# EAGLE board chipcarrier_mehrfach_mill (EAGLE 7.7.0)
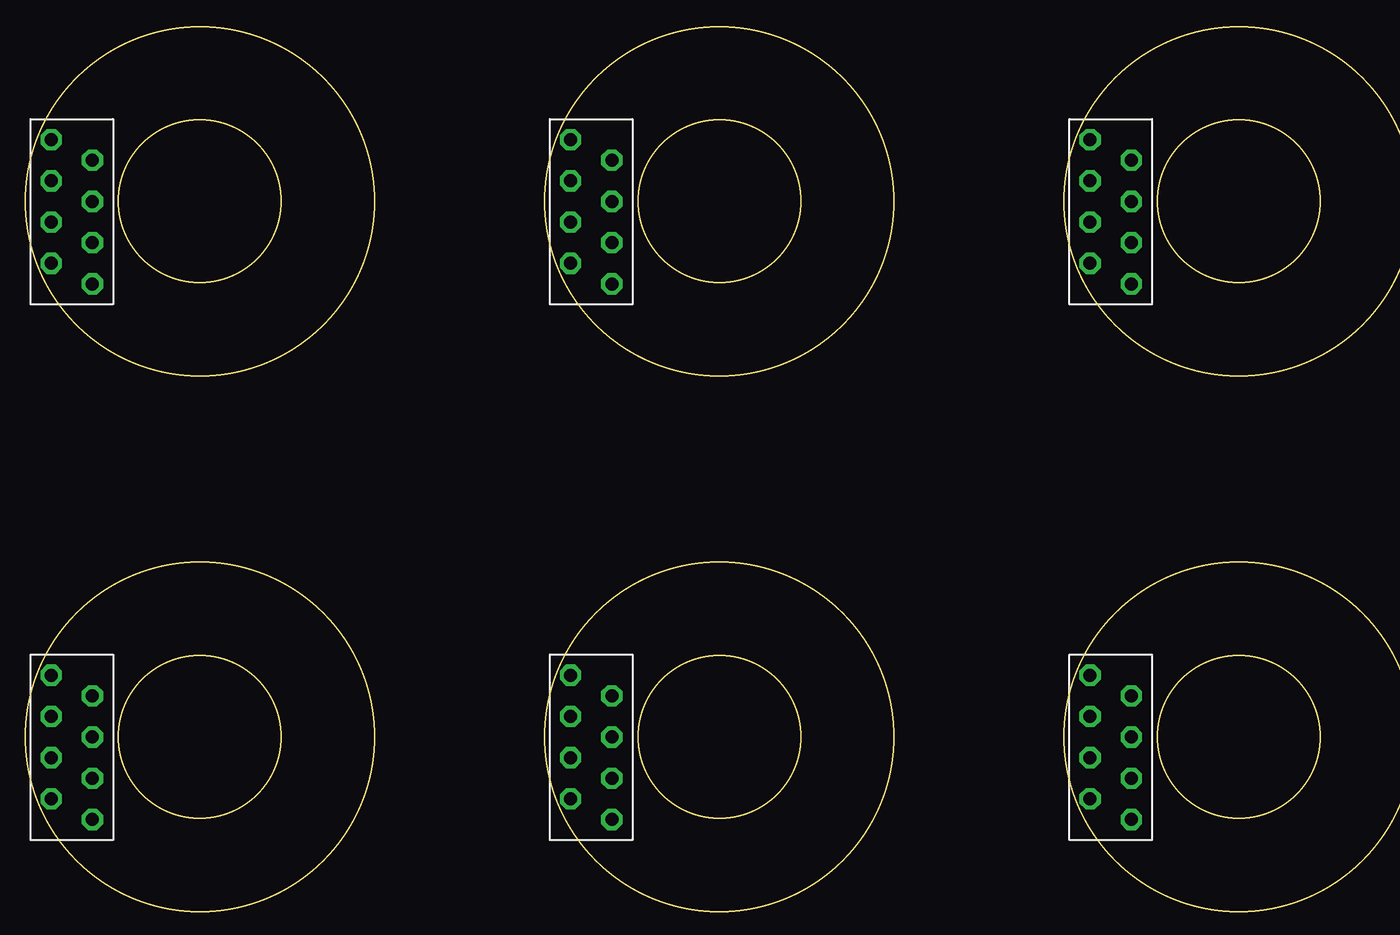
[diagram p0: board, top side]
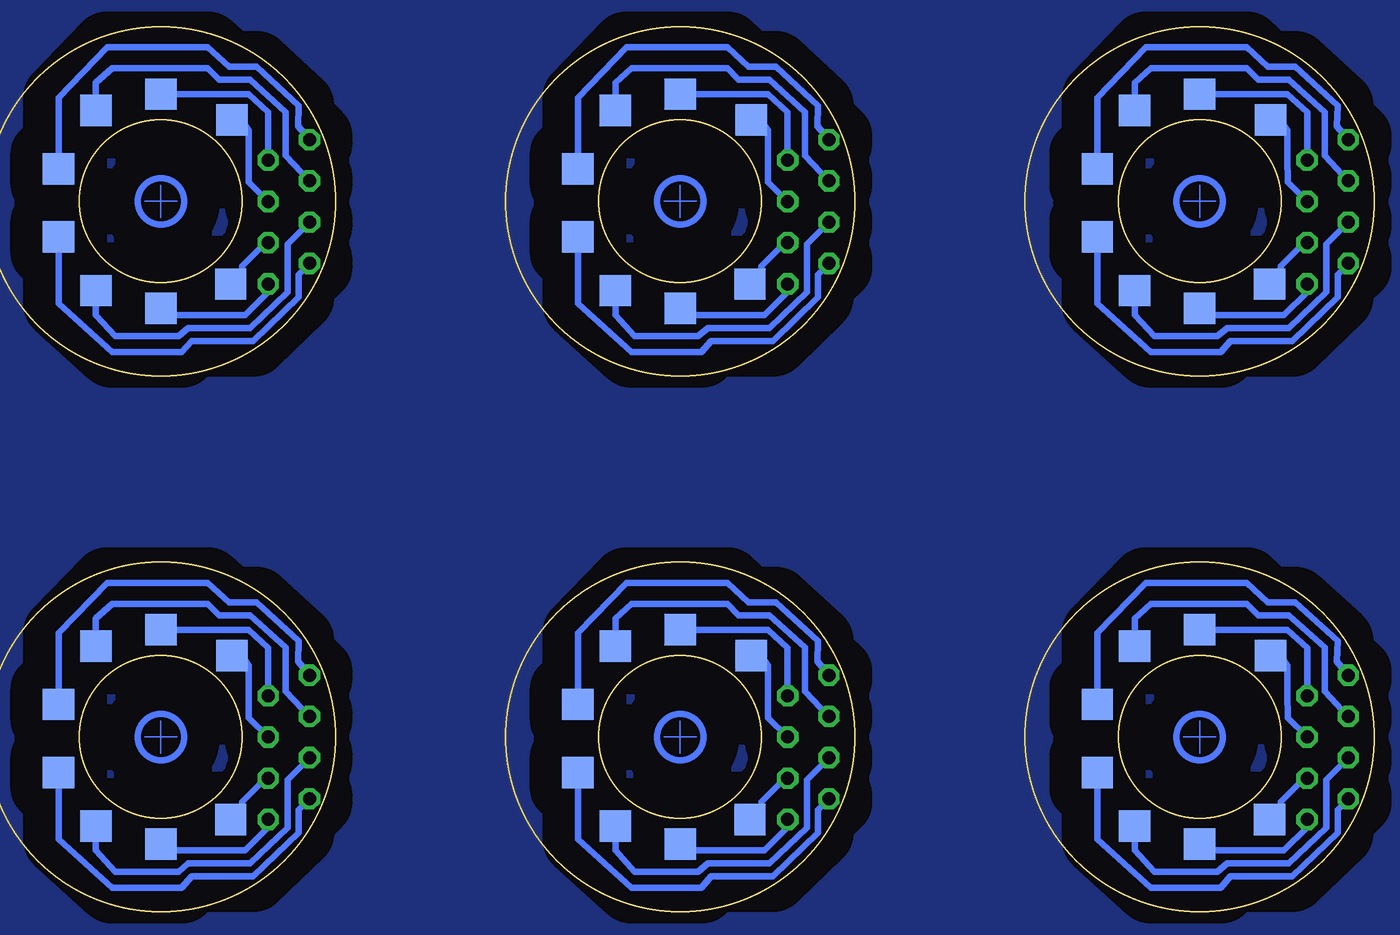
[diagram p1: board, bottom side, seen from below]

No outline drawn. Coordinates in mm, seen from the top.
Copper layers (1*16): Top 0.035mm / dielectric 1.5mm / Bottom 0.035mm
Design rules "default *": minimum track width 10mil, minimum drill 24mil, track to track 2mm, track to pad 3mm, pad to pad 2mm, via to via 2mm, smd to smd 8mil, copper to edge 1mm, drill to drill 8mil, minimum pad ring 10mil, minimum via ring 8mil, stop-mask expansion 4mil, vias tented up to drill 0mil, thermal gap 10mil
Milling: area 13,16 to 23,26; area 7.2,10.2 to 28.8,31.8; area 45,16 to 55,26; area 39.2,10.2 to 60.8,31.8; area 77,16 to 87,26; area 71.2,10.2 to 92.8,31.8; area 13,49 to 23,59; area 7.2,43.2 to 28.8,64.8; area 45,49 to 55,59; area 39.2,43.2 to 60.8,64.8; area 77,49 to 87,59; area 71.2,43.2 to 92.8,64.8; 8 lines

## Footprints (pad centres in the part's own frame; a part is rotated, then mirrored left to right if it is on the bottom)
BUCHSE_8PIN = drill 0.8 octagon: P$1 1.27,0; P$2 -1.27,1.27; P$3 1.27,-2.54; P$4 -1.27,-1.27; P$5 1.27,-5.08; P$6 -1.27,-3.81; P$7 1.27,-7.62; P$8 -1.27,-6.35
PAD = smd 1.93 x 1.93 bottom: P$1 0,0

## Placement (x,y rotation side)
U$1  BUCHSE_8PIN  [BUCHSE_8PIN]  10.11,23.53 0 top
U$2  PAD  [PAD]  18,27.6 90 top
U$3  PAD  [PAD]  24.3,23 90 top
U$4  PAD  [PAD]  13.62,26.01 90 top
U$5  PAD  [PAD]  22,26.6 90 top
U$6  PAD  [PAD]  13.7,15.9 90 top
U$7  PAD  [PAD]  22,15.5 90 top
U$8  PAD  [PAD]  18,14.4 90 top
U$9  PAD  [PAD]  24.3,18.8 180 top
U$10  BUCHSE_8PIN  [BUCHSE_8PIN]  42.11,23.53 0 top
U$11  PAD  [PAD]  50,27.6 90 top
U$12  PAD  [PAD]  56.3,23 90 top
U$13  PAD  [PAD]  45.62,26.01 90 top
U$14  PAD  [PAD]  54,26.6 90 top
U$15  PAD  [PAD]  54,15.5 90 top
U$16  PAD  [PAD]  45.7,15.9 90 top
U$17  PAD  [PAD]  50,14.4 90 top
U$18  PAD  [PAD]  56.3,18.8 180 top
U$19  BUCHSE_8PIN  [BUCHSE_8PIN]  74.11,23.53 0 top
U$20  PAD  [PAD]  82,27.6 90 top
U$21  PAD  [PAD]  88.3,23 90 top
U$22  PAD  [PAD]  77.62,26.01 90 top
U$23  PAD  [PAD]  86,26.6 90 top
U$24  PAD  [PAD]  86,15.5 90 top
U$25  PAD  [PAD]  77.7,15.9 90 top
U$26  PAD  [PAD]  82,14.4 90 top
U$27  PAD  [PAD]  88.3,18.8 180 top
U$28  BUCHSE_8PIN  [BUCHSE_8PIN]  10.11,56.53 0 top
U$29  PAD  [PAD]  18,60.6 90 top
U$30  PAD  [PAD]  24.3,56 90 top
U$31  PAD  [PAD]  13.62,59.01 90 top
U$32  PAD  [PAD]  22,59.6 90 top
U$33  PAD  [PAD]  22,48.5 90 top
U$34  PAD  [PAD]  13.7,48.9 90 top
U$35  PAD  [PAD]  18,47.4 90 top
U$36  PAD  [PAD]  24.3,51.8 180 top
U$37  BUCHSE_8PIN  [BUCHSE_8PIN]  42.11,56.53 0 top
U$38  PAD  [PAD]  50,60.6 90 top
U$39  PAD  [PAD]  56.3,56 90 top
U$40  PAD  [PAD]  45.62,59.01 90 top
U$41  PAD  [PAD]  54,59.6 90 top
U$42  PAD  [PAD]  54,48.5 90 top
U$43  PAD  [PAD]  45.7,48.9 90 top
U$44  PAD  [PAD]  50,47.4 90 top
U$45  PAD  [PAD]  56.3,51.8 180 top
U$46  BUCHSE_8PIN  [BUCHSE_8PIN]  74.11,56.53 0 top
U$47  PAD  [PAD]  82,60.6 90 top
U$48  PAD  [PAD]  88.3,56 90 top
U$49  PAD  [PAD]  77.62,59.01 90 top
U$50  PAD  [PAD]  86,59.6 90 top
U$51  PAD  [PAD]  86,48.5 90 top
U$52  PAD  [PAD]  77.7,48.9 90 top
U$53  PAD  [PAD]  82,47.4 90 top
U$54  PAD  [PAD]  88.3,51.8 180 top

## Library data of the parts
U$1-U$54 = chipcarrier

## Nets
N$1: U$1.P$1 U$2.P$1
N$2: U$1.P$2 U$3.P$1
N$3: U$1.P$3 U$4.P$1
N$4: U$1.P$4 U$5.P$1
N$5: U$1.P$5 U$6.P$1
N$6: U$1.P$6 U$7.P$1
N$7: U$1.P$7 U$8.P$1
N$8: U$1.P$8 U$9.P$1
N$9: U$10.P$1 U$11.P$1
N$12: U$10.P$2 U$12.P$1
N$13: U$10.P$3 U$13.P$1
N$14: U$10.P$4 U$14.P$1
N$15: U$10.P$5 U$16.P$1
N$16: U$10.P$6 U$15.P$1
N$17: U$10.P$7 U$17.P$1
N$18: U$10.P$8 U$18.P$1
N$21: U$19.P$1 U$20.P$1
N$22: U$19.P$2 U$21.P$1
N$23: U$19.P$3 U$22.P$1
N$24: U$19.P$4 U$23.P$1
N$25: U$19.P$5 U$25.P$1
N$26: U$19.P$6 U$24.P$1
N$27: U$19.P$7 U$26.P$1
N$28: U$19.P$8 U$27.P$1
N$31: U$28.P$1 U$29.P$1
N$32: U$28.P$2 U$30.P$1
N$33: U$28.P$3 U$31.P$1
N$34: U$28.P$4 U$32.P$1
N$35: U$28.P$5 U$34.P$1
N$36: U$28.P$6 U$33.P$1
N$37: U$28.P$7 U$35.P$1
N$38: U$28.P$8 U$36.P$1
N$41: U$37.P$1 U$38.P$1
N$42: U$37.P$2 U$39.P$1
N$43: U$37.P$3 U$40.P$1
N$44: U$37.P$4 U$41.P$1
N$45: U$37.P$5 U$43.P$1
N$46: U$37.P$6 U$42.P$1
N$47: U$37.P$7 U$44.P$1
N$48: U$37.P$8 U$45.P$1
N$51: U$46.P$1 U$47.P$1
N$52: U$46.P$2 U$48.P$1
N$53: U$46.P$3 U$49.P$1
N$54: U$46.P$4 U$50.P$1
N$55: U$46.P$5 U$52.P$1
N$56: U$46.P$6 U$51.P$1
N$57: U$46.P$7 U$53.P$1
N$58: U$46.P$8 U$54.P$1

## Tracks (layer width: path | path; a pad name or v marks a point on that pad's centre or on a via)
N$1
  Bottom 0.406: U$1.P$1 11.38,26.48 12.6,27.6 U$2.P$1
N$2
  Bottom 0.406: U$1.P$2 9.54,25.64 9.5,26.9 12.1,29.3 13.8,29.3 15.1,30.5 21.3,30.5 24.3,27.4 U$3.P$1 25,22.5
N$3
  Bottom 0.406: U$1.P$3 12.58,22.18 12.6,23.7 12.6,25.4 13,26 13.31,26 U$4.P$1
N$4
  Bottom 0.406: U$1.P$4 8.84,22.24 10.3,23.8 10.3,26.5 12.5,28.5 14.4,28.5 15.1,29.2 21,29.2 22,28.3 U$5.P$1
N$5
  Bottom 0.406: U$1.P$5 11.55,18.45 13,17 13,16.2 U$6.P$1
N$6
  Bottom 0.406: U$1.P$6 10.2,18.36 10.2,15.4 12.5,13.2 16.3,13.2 16.9,12.7 20.8,12.7 22,14 U$7.P$1
N$7
  Bottom 0.406: U$1.P$7 11.38,15.42 12.8,14 17.9,14 U$8.P$1
N$8
  Bottom 0.406: 25,19.5 U$9.P$1 24.3,14.7 21,11.7 16.7,11.7 16.1,12.4 12.3,12.4 9.5,15.1 9.5,16.5 8.84,17.16 U$1.P$8
N$9
  Bottom 0.406: U$10.P$1 43.38,26.48 44.6,27.6 U$11.P$1
N$10
  Bottom 0.1: 18,22 18,20
N$11
  Bottom 0.1: 17,21 19,21
N$12
  Bottom 0.406: U$10.P$2 41.54,25.64 41.5,26.9 44.1,29.3 45.8,29.3 47.1,30.5 53.3,30.5 56.3,27.4 U$12.P$1 57,22.5
N$13
  Bottom 0.406: U$10.P$3 44.58,22.18 44.6,23.7 44.6,25.4 45,26 45.31,26 U$13.P$1
N$14
  Bottom 0.406: U$10.P$4 40.84,22.24 42.3,23.8 42.3,26.5 44.5,28.5 46.4,28.5 47.1,29.2 53,29.2 54,28.3 U$14.P$1
N$15
  Bottom 0.406: U$10.P$5 43.55,18.45 45,17 45,16.2 U$16.P$1
N$16
  Bottom 0.406: U$10.P$6 42.2,18.36 42.2,15.4 44.5,13.2 48.3,13.2 48.9,12.7 52.8,12.7 54,14 U$15.P$1
N$17
  Bottom 0.406: U$10.P$7 43.38,15.42 44.8,14 49.9,14 U$17.P$1
N$18
  Bottom 0.406: 57,19.5 U$18.P$1 56.3,14.7 53,11.7 48.7,11.7 48.1,12.4 44.3,12.4 41.5,15.1 41.5,16.5 40.84,17.16 U$10.P$8
N$19
  Bottom 0.1: 50,22 50,20
N$20
  Bottom 0.1: 49,21 51,21
N$21
  Bottom 0.406: U$19.P$1 75.38,26.48 76.6,27.6 U$20.P$1
N$22
  Bottom 0.406: U$19.P$2 73.54,25.64 73.5,26.9 76.1,29.3 77.8,29.3 79.1,30.5 85.3,30.5 88.3,27.4 U$21.P$1 89,22.5
N$23
  Bottom 0.406: U$19.P$3 76.58,22.18 76.6,23.7 76.6,25.4 77,26 77.31,26 U$22.P$1
N$24
  Bottom 0.406: U$19.P$4 72.84,22.24 74.3,23.8 74.3,26.5 76.5,28.5 78.4,28.5 79.1,29.2 85,29.2 86,28.3 U$23.P$1
N$25
  Bottom 0.406: U$19.P$5 75.55,18.45 77,17 77,16.2 U$25.P$1
N$26
  Bottom 0.406: U$19.P$6 74.2,18.36 74.2,15.4 76.5,13.2 80.3,13.2 80.9,12.7 84.8,12.7 86,14 U$24.P$1
N$27
  Bottom 0.406: U$19.P$7 75.38,15.42 76.8,14 81.9,14 U$26.P$1
N$28
  Bottom 0.406: 89,19.5 U$27.P$1 88.3,14.7 85,11.7 80.7,11.7 80.1,12.4 76.3,12.4 73.5,15.1 73.5,16.5 72.84,17.16 U$19.P$8
N$29
  Bottom 0.1: 82,22 82,20
N$30
  Bottom 0.1: 81,21 83,21
N$31
  Bottom 0.406: U$28.P$1 11.38,59.48 12.6,60.6 U$29.P$1
N$32
  Bottom 0.406: U$28.P$2 9.54,58.64 9.5,59.9 12.1,62.3 13.8,62.3 15.1,63.5 21.3,63.5 24.3,60.4 U$30.P$1 25,55.5
N$33
  Bottom 0.406: U$28.P$3 12.58,55.18 12.6,56.7 12.6,58.4 13,59 13.31,59 U$31.P$1
N$34
  Bottom 0.406: U$28.P$4 8.84,55.24 10.3,56.8 10.3,59.5 12.5,61.5 14.4,61.5 15.1,62.2 21,62.2 22,61.3 U$32.P$1
N$35
  Bottom 0.406: U$28.P$5 11.55,51.45 13,50 13,49.2 U$34.P$1
N$36
  Bottom 0.406: U$28.P$6 10.2,51.36 10.2,48.4 12.5,46.2 16.3,46.2 16.9,45.7 20.8,45.7 22,47 U$33.P$1
N$37
  Bottom 0.406: U$28.P$7 11.38,48.42 12.8,47 17.9,47 U$35.P$1
N$38
  Bottom 0.406: 25,52.5 U$36.P$1 24.3,47.7 21,44.7 16.7,44.7 16.1,45.4 12.3,45.4 9.5,48.1 9.5,49.5 8.84,50.16 U$28.P$8
N$39
  Bottom 0.1: 18,55 18,53
N$40
  Bottom 0.1: 17,54 19,54
N$41
  Bottom 0.406: U$37.P$1 43.38,59.48 44.6,60.6 U$38.P$1
N$42
  Bottom 0.406: U$37.P$2 41.54,58.64 41.5,59.9 44.1,62.3 45.8,62.3 47.1,63.5 53.3,63.5 56.3,60.4 U$39.P$1 57,55.5
N$43
  Bottom 0.406: U$37.P$3 44.58,55.18 44.6,56.7 44.6,58.4 45,59 45.31,59 U$40.P$1
N$44
  Bottom 0.406: U$37.P$4 40.84,55.24 42.3,56.8 42.3,59.5 44.5,61.5 46.4,61.5 47.1,62.2 53,62.2 54,61.3 U$41.P$1
N$45
  Bottom 0.406: U$37.P$5 43.55,51.45 45,50 45,49.2 U$43.P$1
N$46
  Bottom 0.406: U$37.P$6 42.2,51.36 42.2,48.4 44.5,46.2 48.3,46.2 48.9,45.7 52.8,45.7 54,47 U$42.P$1
N$47
  Bottom 0.406: U$37.P$7 43.38,48.42 44.8,47 49.9,47 U$44.P$1
N$48
  Bottom 0.406: 57,52.5 U$45.P$1 56.3,47.7 53,44.7 48.7,44.7 48.1,45.4 44.3,45.4 41.5,48.1 41.5,49.5 40.84,50.16 U$37.P$8
N$49
  Bottom 0.1: 50,55 50,53
N$50
  Bottom 0.1: 49,54 51,54
N$51
  Bottom 0.406: U$46.P$1 75.38,59.48 76.6,60.6 U$47.P$1
N$52
  Bottom 0.406: U$46.P$2 73.54,58.64 73.5,59.9 76.1,62.3 77.8,62.3 79.1,63.5 85.3,63.5 88.3,60.4 U$48.P$1 89,55.5
N$53
  Bottom 0.406: U$46.P$3 76.58,55.18 76.6,56.7 76.6,58.4 77,59 77.31,59 U$49.P$1
N$54
  Bottom 0.406: U$46.P$4 72.84,55.24 74.3,56.8 74.3,59.5 76.5,61.5 78.4,61.5 79.1,62.2 85,62.2 86,61.3 U$50.P$1
N$55
  Bottom 0.406: U$46.P$5 75.55,51.45 77,50 77,49.2 U$52.P$1
N$56
  Bottom 0.406: U$46.P$6 74.2,51.36 74.2,48.4 76.5,46.2 80.3,46.2 80.9,45.7 84.8,45.7 86,47 U$51.P$1
N$57
  Bottom 0.406: U$46.P$7 75.38,48.42 76.8,47 81.9,47 U$53.P$1
N$58
  Bottom 0.406: 89,52.5 U$54.P$1 88.3,47.7 85,44.7 80.7,44.7 80.1,45.4 76.3,45.4 73.5,48.1 73.5,49.5 72.84,50.16 U$46.P$8
N$59
  Bottom 0.1: 82,55 82,53
N$60
  Bottom 0.1: 81,54 83,54
S$1
  pour Bottom: 0,75 0,0 100,0 100,75
(copper drawn outside any net)
  shapes: Bottom circle x6